# Altium PCB PCB1.PcbDoc (part 2 of 2)
Units mm, origin at the board's own origin, x right, y up, seen from the top; angles counter-clockwise.
Board outline 66.67 x 62.99 mm, 6 copper layers (Top Layer, Signal 1, Signal 2, GND, Power, Bottom Layer), stack 1.313 mm thick; 81 components, 107 nets, 466 pads, 129 vias.
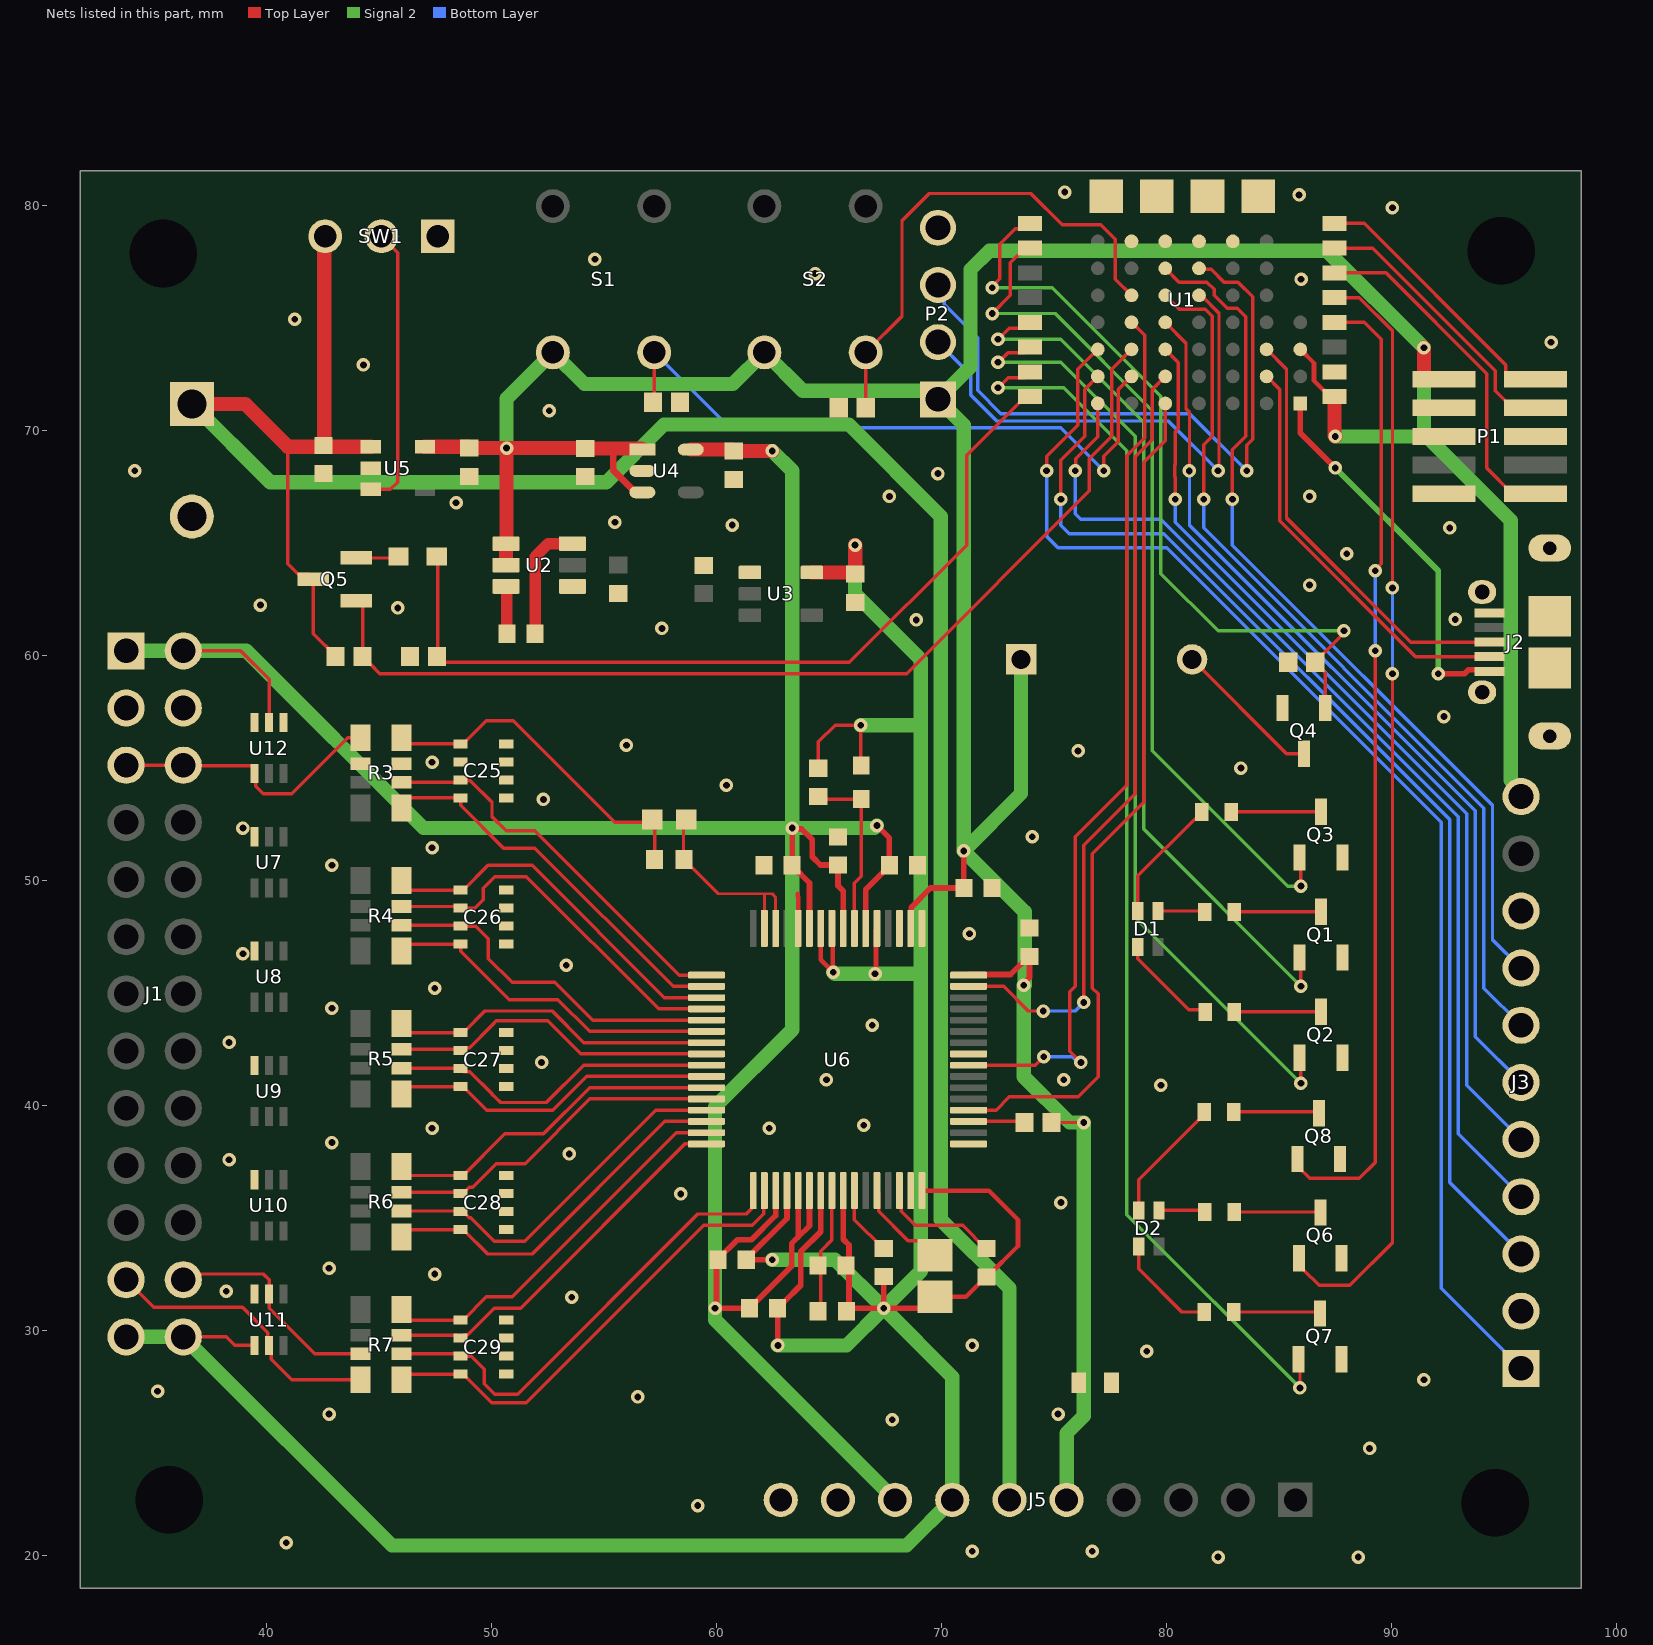
[diagram p4: the nets of this part, all layers, seen from the top]

## Via types
v1: diameter 0.6, hole 0.3, Top Layer to Bottom Layer, tented both sides, 129 vias

## Nets (pads, with @x,y where several pads share a name; then routed paths per layer and width w, separated by ;. In a path a pad name is that pad's centre, name@x,y a point inside that pad or via, vN(x,y) a via of type N, cw(c..) or ccw(c..) an arc to the next point about the centre after c; other vN are vias at no path point) (continued)
AFERST: U1.B6 U6.36 | length 37.7
  Top Layer w0.152: U6.36@71.213,39.791 72.43,39.791 73.025,40.386 76.073,40.386 76.962,41.275 76.962,44.958 76.708,45.212 76.708,51.181 78.994,53.467 78.994,68.58 79.949,69.535 U1.B6@79.949,71.191
AFESCK: U1.A3 U6.40 | length 40
  Top Layer w0.152: U6.40@71.213,41.791 74.174,41.791 74.547,42.164 v1(74.549,42.164) ; v1(76.2,41.91) 75.699,42.411 75.699,45.046 75.946,45.293 75.946,51.943 78.232,54.229 78.232,68.868 79.03,69.666 79.03,74.21 U1.A3@78.449,74.791
  Bottom Layer w0.152: v1(74.549,42.164) 75.825,42.164 76.079,41.91 v1(76.2,41.91)
AGND: C9.2 C10.2 C22.2 C23.2 C24.2 C25.1 C25.2 C25.3 C25.4 C25.6 C26.1 C26.2 C26.3 C26.4 C27.1 C27.2 C27.3 C27.4 C28.1 C28.2 C28.3 C28.4 C29.1 C29.2 C29.3 C29.4 J1.03 J1.04 J5.10 R3.2 R3.7 R20.2 U6.31 U6.33 U6.41 U6.49 U6.51 U6.60 U7.3 U8.3 U9.3 U10.3 U11.3 U12.1 U12.3 | length 1.5
  Top Layer w0.203: 63.627,49.403 63.627,49.276 63.638,49.265 U6.60@63.638,47.866
  other v1: 40.894,20.574 59.182,22.225 67.818,26.035 42.799,26.289 75.184,26.289 56.515,27.051 35.179,27.305 71.374,29.337 53.575,31.477 38.227,31.75 47.498,32.512 42.799,32.766 75.311,35.687 58.42,36.068 38.354,37.592 53.467,37.846 42.926,38.354 47.371,38.989 62.357,38.989 66.548,39.116 64.897,41.148 75.438,41.148 52.236,41.91 38.354,42.799 66.929,43.561 42.926,44.323 47.498,45.212 53.34,46.228 38.971,46.736 71.247,47.625 42.926,50.673 47.371,51.453 38.971,52.324 52.324,53.594 60.452,54.229 47.371,55.245 56.007,56.007
AVDD: C6.1 C11.1 C12.1 C22.1 C23.1 C24.1 J1.01 J1.02 J5.8 U4.5 U6.19 U6.21 U6.22 U6.54 U6.56 U6.59 U12.2 | length 130.9
  Top Layer w0.152: J1.02@36.322,60.198 38.862,60.198 40.132,58.928 U12.2@40.132,57.017 ; C23.1@63.373,50.646 C23.1@63.373,50.673 ; v1(63.373,52.324) v1@63.41,52.287 ; C24.1@67.691,50.646 C24.1@67.691,50.673
  Top Layer w0.254: U6.19@62.638,36.216 62.638,35.106 61.568,34.036 60.941,34.036 60.079,33.174 C11.1@60.079,33.147 60.012,33.08 60.012,31.052 v1(59.946,30.986) 61.474,30.986 C12.1@61.476,30.988 61.476,31.015 61.728,31.267 61.755,31.267 63.348,32.86 63.348,33.861 63.638,34.152 ; C23.1@63.373,50.646 64.138,49.881 U6.59@64.138,47.866 ; C23.1@63.373,50.673 v1(63.373,52.324) ; v1@63.41,52.287 63.791,52.287 64.262,51.816 64.262,51.054 64.635,50.681 C22.1@65.405,50.681 ; U6.21@63.638,36.216 63.638,34.152 ; U6.22@64.138,36.216 64.138,34.652 63.638,34.152 ; C22.1@65.405,50.546 65.405,49.763 65.638,49.53 U6.56@65.638,47.866 ; U6.54@66.638,47.866 66.638,49.593 C24.1@67.691,50.646 ; v1(67.137,52.434) 67.691,51.88 C24.1@67.691,50.673
  Top Layer w0.635: U4.5@58.868,69.141 60.713,69.141 60.774,69.08 v1(62.492,69.08)
  Signal 2 w0.635: J1.01@33.782,60.198 J1.02@36.322,60.198 39.116,60.198 46.99,52.324 v1(63.373,52.324) ; v1(62.492,69.08) 63.373,68.199 v1(63.373,52.324) ; v1(67.137,52.434) 67.027,52.324 v1(63.373,52.324) ; J5.8@67.945,22.479 59.946,30.478 59.946,39.941 63.373,43.368 v1(63.373,52.324)
AVSS: C4.1 C11.2 C12.2 C13.2 C14.2 C15.2 C16.2 C17.2 C19.2 C20.2 J1.25 J1.26 J5.7 U3.5 U6.20 U6.23 U6.25 U6.32 U6.53 U6.57 U6.58 U11.4 | length 156.5
  Top Layer w0.152: J1.26@36.322,29.718 38.227,29.718 38.602,29.343 U11.4@39.482,29.343 ; C15.2@64.535,54.983 64.535,56.153 65.278,56.896 v1(66.421,56.896) 66.421,55.133 C16.2@66.44,55.114 ; v1(67.056,45.847) v1@67.097,45.888 ; U6.53@67.097,47.825 U6.53@67.138,47.866
  Top Layer w0.203: U6.58@64.641,47.863 64.641,46.471 v1(65.197,45.914) ; U6.57@65.138,47.866 65.167,47.837 v1@65.167,46.003 ; v1@67.097,45.888 U6.53@67.097,47.825 ; U6.32@69.138,36.216 72.115,36.216 73.406,34.925 73.406,33.755 72.036,32.385 C14.2@72.009,32.385 71.982,32.385 71.093,31.496 C13.2@69.723,31.496
  Top Layer w0.254: v1(62.484,33.147) C11.2@61.333,33.147 61.333,33.174 63.138,34.979 U6.20@63.138,36.216 ; v1(62.738,29.337) 62.734,29.341 62.734,30.984 C12.2@62.73,30.988 62.73,31.015 62.982,31.267 63.009,31.267 63.754,32.012 63.754,33.506 64.638,34.39 U6.23@64.638,36.216 ; U6.25@65.638,36.216 65.638,34.057 65.897,33.798 C19.2@65.897,33.147 ; C19.2@65.77,32.893 65.897,32.766 65.897,30.988 v1(67.437,30.988) ; C17.2@67.437,32.393 v1(67.437,30.988) ; C13.2@69.723,31.496 69.215,30.988 v1(67.437,30.988)
  Top Layer w0.635: U3.5@64.248,63.68 C4.1@66.175,63.68 ; v1(66.167,64.897) 66.175,64.889 C4.1@66.175,63.68 ; C4.1@66.175,63.603 C4.1@66.175,63.68
  Signal 2 w0.635: J1.25@33.782,29.718 J1.26@36.322,29.718 45.593,20.447 68.453,20.447 J5.7@70.485,22.479 70.485,27.94 v1(67.437,30.988) ; v1(62.484,33.147) 65.278,33.147 v1(67.437,30.988) ; v1(62.738,29.337) 65.786,29.337 v1(67.437,30.988) ; v1(65.197,45.914) 65.264,45.847 v1(67.056,45.847) 68.961,45.847 69.088,45.72 ; v1(66.167,64.897) 66.167,62.738 69.088,59.817 69.088,56.896 ; v1(66.421,56.896) 69.088,56.896 ; v1(67.437,30.988) 69.088,32.639 69.088,45.72 ; 69.088,45.72 69.088,56.896
BATLVL: R14.1 R18.2 U1.8 | length 38.1
  Top Layer w0.152: R14.1@47.586,64.389 47.625,64.35 47.625,59.978 R18.2@47.591,59.944 47.845,59.69 65.913,59.69 71.12,64.897 71.12,68.884 73.727,71.491 U1.8@73.93,71.491
BATMEASEN: Q5.1 R11.2 U1.A4 | length 45.7
  Top Layer w0.152: Q5.1@44.003,62.423 44.065,62.423 44.289,62.199 44.289,59.918 44.616,59.591 44.642,59.591 45.051,59.182 68.455,59.182 76.576,67.303 76.576,68.736 77.563,69.723 77.563,72.705 U1.A4@78.449,73.591
BATT: C7.1 J4.1 J5.6 Q5.3 R11.1 SW1.3 U5.1 | length 110.9
  Top Layer w0.152: 40.968,69.268 40.968,64.061 41.432,63.597 41.879,63.597 Q5.3@42.103,63.373 42.103,60.954 43.087,59.97 R11.1@43.087,59.944
  Top Layer w0.635: J4.1@36.703,71.167 39.069,71.167 40.968,69.268 U5.1@44.655,69.268 ; C7.1@42.553,69.326 42.589,69.362 42.589,78.577 SW1.3@42.625,78.613
  Signal 2 w0.635: J4.1@36.703,71.167 40.179,67.691 55.118,67.691 57.678,70.251 65.893,70.251 69.977,66.167 69.977,34.925 73.025,31.877 J5.6@73.025,22.479
BIAS: J1.05 J1.06 R3.1 U12.4 | length 12.4
  Top Layer w0.152: J1.05@33.782,55.118 J1.06@36.322,55.118 36.347,55.093 39.38,55.093 39.482,54.991 U12.4@39.482,54.743 39.543,54.682 39.543,54.183 39.878,53.848 41.148,53.848 43.635,56.335 R3.1@44.196,56.335
BIASDRV: C18.2 C25.5 R2.2 R3.8 | length 15.2
  Top Layer w0.152: R3.8@46.025,56.337 46.298,56.064 C25.5@48.641,56.064 48.755,56.064 49.784,57.093 50.984,57.093 55.499,52.578 57.048,52.578 57.261,52.365 R2.2@57.261,50.927
BLUEN1: Q1.1 U1.5 | length 39
  Top Layer w0.152: v1(72.517,74.041) 73.013,74.537 73.676,74.537 U1.5@73.93,74.791 ; Q1.1@85.915,46.571 85.976,46.51 v1(85.976,45.301)
  Signal 2 w0.152: v1(72.517,74.041) 75.311,74.041 78.994,70.358 78.994,52.283 v1(85.976,45.301)
BLUEN2: Q6.1 U1.13 | length 49.3
  Top Layer w0.152: Q6.1@85.885,33.217 85.885,32.899 86.075,32.709 86.78,32.004 88.138,32.004 90.043,33.909 v1(90.043,59.182) ; U1.13@87.468,75.891 88.574,75.891 90.043,74.422 v1(90.043,62.992)
  Bottom Layer w0.152: v1(90.043,59.182) v1(90.043,62.992)
BUZZEN: Q4.1 R12.1 U1.1 | length 34.5
  Top Layer w0.152: v1(72.263,76.327) 72.263,76.395 72.603,76.735 72.603,78.269 73.286,78.952 73.691,78.952 U1.1@73.93,79.191 ; Q4.1@87.056,57.658 87.056,59.222 86.614,59.664 86.614,59.716 87.884,60.986 v1(87.884,61.087)
  Signal 2 w0.152: v1(72.263,76.327) 74.93,76.327 79.756,71.501 79.756,63.627 82.296,61.087 v1(87.884,61.087)
D_N: J2.2 U1.E5 | length 18.5
  Top Layer w0.152: U1.E5@84.449,72.391 85.03,71.81 85.03,65.973 91.067,59.936 J2.2@94.353,59.936
D_P: J2.3 U1.E4 | length 19.2
  Top Layer w0.152: U1.E4@84.449,73.591 85.335,72.705 85.335,66.099 90.848,60.586 J2.3@94.353,60.586
DATAEN: R13.1 S1.3 U1.A5 | length 29.1
  Top Layer w0.152: R13.1@57.184,71.247 57.241,71.304 S1.3@57.241,73.458 ; v1(77.216,68.199) 77.216,68.834 77.868,69.486 77.868,71.81 U1.A5@78.449,72.391
  Bottom Layer w0.152: S1.3@57.241,73.458 60.595,70.104 75.311,70.104 v1(77.216,68.199)
DC: J3.3 U1.Z5 | length 50.6
  Top Layer w0.152: v1(75.311,66.929) 75.311,68.666 76.368,69.723 76.368,71.81 U1.Z5@76.949,72.391
  Bottom Layer w0.152: v1(75.311,66.929) 75.311,65.786 75.692,65.405 79.883,65.405 92.583,52.705 92.583,36.576 J3.3@95.758,33.401
DRDY: U1.B5 U6.47 | length 35
  Top Layer w0.152: U6.47@71.213,45.291 72.774,45.291 73.869,44.196 v1(74.531,44.196) ; v1(76.329,44.577) 76.327,44.579 76.327,51.562 78.613,53.848 78.613,68.818 79.368,69.573 79.368,71.81 U1.B5@79.949,72.391
  Bottom Layer w0.152: v1(74.531,44.196) 75.946,44.196 76.327,44.577 v1(76.329,44.577)
DVDD: C5.1 C8.1 C9.1 C10.1 J3.11 J5.5 LS1.1 P1.1 P2.1 R1.1 S1.1 S2.1 U1.9 U1.F4 U2.4 U2.5 U4.1 U4.3 U5.5 U6.48 U6.50 | length 176.3
  Top Layer w0.127: C8.1@48.969,69.268 C8.1@49.03,69.207 ; U4.1@56.668,69.191 U4.1@56.718,69.141
  Top Layer w0.152: R1.1@74.896,39.243 v1(76.327,39.243)
  Top Layer w0.203: U1.F4@85.949,73.591 86.555,72.985 86.555,72.201 87.265,71.491 U1.9@87.468,71.491
  Top Layer w0.254: U6.50@68.638,47.866 68.661,47.889 68.661,48.797 69.521,49.657 C9.1@71.001,49.657 70.997,49.661 70.997,51.304 v1(70.993,51.308) ; U6.48@71.213,45.791 71.236,45.814 73.076,45.814 73.887,46.625 C10.1@73.914,46.625 73.914,45.687 73.66,45.433 v1(73.66,45.339)
  Top Layer w0.305: 55.423,69.191 55.423,68.223 56.405,67.241 U4.3@56.718,67.241
  Top Layer w0.635: U5.5@47.055,69.268 C8.1@48.969,69.268 ; C8.1@49.03,69.207 v1(50.681,69.207) ; U2.5@50.66,64.008 U2.4@50.66,64.958 50.674,64.958 50.681,64.965 v1(50.681,69.207) ; U4.1@56.668,69.191 55.423,69.191 C5.1@54.178,69.191 54.162,69.207 v1(50.681,69.207) ; R1.1@74.803,39.37 74.896,39.277 R1.1@74.896,39.243 ; U1.9@87.468,71.491 87.468,69.758 v1(87.503,69.723) ; v1(91.442,73.662) 91.442,72.316 91.495,72.263 P1.1@92.326,72.263
  Signal 2 w0.635: v1(50.681,69.207) 50.681,71.398 S1.1@52.741,73.458 54.143,72.056 60.737,72.056 S2.1@62.139,73.458 63.842,71.755 69.469,71.755 P2.1@69.85,71.374 ; LS1.1@73.543,59.817 73.543,53.858 v1(70.993,51.308) ; v1(73.66,45.339) 73.66,41.275 75.692,39.243 v1(76.327,39.243) 76.327,26.2 75.565,25.438 J5.5@75.565,22.479 ; v1@73.7,45.339 73.7,48.601 v1(70.993,51.308) ; v1(87.503,69.723) 91.318,69.723 91.442,69.848 ; J3.11@95.758,53.721 95.758,53.996 95.301,54.453 95.301,65.989 91.442,69.848 ; P2.1@69.85,71.374 70.993,70.231 v1(70.993,51.308) ; P2.1@69.85,71.374 71.298,72.822 71.298,77.14 72.136,77.978 87.127,77.978 v1(91.442,73.662) 91.442,69.848
GND: C1.2 C3.2 C4.2 C5.2 C6.2 C7.2 C8.2 J2.5 J2.6 J2.7 J2.8 J2.9 J2.10 J2.11 J3.9 J4.2 J5.9 P1.3 P1.5 P1.9 P2.4 Q1.2 Q2.2 Q3.2 Q4.2 Q6.2 Q7.2 Q8.2 R12.2 R13.2 R18.1 R19.2 R20.1 SW1.1 U1.10 U1.A0 U1.B0 U1.C0 U1.D0 U1.H0 U1.H1 U1.H2 U1.H3 U2.1 U3.1 U4.2 U5.2
  other v1: 82.296,19.939 88.519,19.939 71.374,20.193 76.708,20.193 89.027,24.765 91.44,27.813 79.121,29.083 79.756,40.894 74.041,51.943 83.312,54.991 76.073,55.753 92.329,57.277 57.585,61.193 68.888,61.574 92.837,61.595 45.847,62.103 39.751,62.23 86.36,63.119 88.011,64.516 92.583,65.659 60.706,65.786 55.499,65.913 48.441,66.781 67.691,67.056 86.36,67.056 69.85,68.072 34.163,68.199 52.578,70.866 44.323,72.898 97.088,73.908 41.275,74.93 85.979,76.708 64.389,76.962 54.61,77.597 90.043,79.883 85.895,80.455 75.481,80.582
GRNEN1: Q3.1 U1.2 | length 38.1
  Top Layer w0.152: v1(72.263,75.184) 73.07,75.991 73.07,77.308 73.07,77.434 73.727,78.091 U1.2@73.93,78.091 ; Q3.1@85.915,51.016 85.976,50.955 v1(85.976,49.746)
  Signal 2 w0.152: v1(72.263,75.184) 75.057,75.184 79.375,70.866 79.375,55.763 85.392,49.746 v1(85.976,49.746)
GRNEN2: Q8.1 U1.12 | length 43.4
  Top Layer w0.152: Q8.1@85.819,37.617 85.819,37.3 86.362,36.757 88.573,36.757 89.281,37.465 v1(89.281,60.198) ; U1.12@87.468,74.791 88.785,74.791 89.535,74.041 89.535,64.067 89.281,63.813 v1(89.281,63.754)
  Bottom Layer w0.152: v1(89.281,60.198) v1(89.281,63.754)
IN1N: C29.5 R7.8 U6.15 | length 17.2
  Top Layer w0.152: R7.8@46.025,30.937 46.025,30.848 46.406,30.467 C29.5@48.641,30.467 48.755,30.467 49.784,31.496 50.927,31.496 58.222,38.791 U6.15@59.563,38.791
IN1P: C29.6 R7.7 U6.16 | length 17.2
  Top Layer w0.152: R7.7@46.025,29.79 48.518,29.79 C29.6@48.641,29.667 48.781,29.807 48.95,29.807 50.131,30.988 51.308,30.988 58.611,38.291 U6.16@59.563,38.291
IN2N: C28.7 R6.6 U6.13 | length 16.5
  Top Layer w0.152: R6.6@46.025,35.31 48.618,35.31 C28.7@48.641,35.287 48.755,35.287 49.035,35.008 49.09,35.008 50.131,33.966 51.492,33.966 57.317,39.791 U6.13@59.563,39.791
IN2P: C28.8 R6.5 U6.14 | length 16.6
  Top Layer w0.152: R6.5@46.025,34.163 46.349,34.487 C28.8@48.641,34.487 48.755,34.487 49.841,33.401 51.816,33.401 57.706,39.291 U6.14@59.563,39.291
IN3N: C28.5 R6.8 U6.11 | length 15.3
  Top Layer w0.152: R6.8@46.025,37.287 46.025,37.268 46.406,36.887 C28.5@48.641,36.887 48.755,36.887 50.603,38.735 52.324,38.735 54.38,40.791 U6.11@59.563,40.791
IN3P: C28.6 R6.7 U6.12 | length 15.3
  Top Layer w0.152: R6.7@46.025,36.14 48.588,36.14 C28.6@48.641,36.087 48.755,36.087 49.035,36.366 49.183,36.366 50.224,37.408 51.505,37.408 54.388,40.291 U6.12@59.563,40.291
IN4N: C27.7 R5.6 U6.9 | length 14.9
  Top Layer w0.152: R5.6@46.036,41.649 R5.6@46.025,41.66 48.618,41.66 48.629,41.649 C27.7@48.641,41.637 48.773,41.505 49.046,41.505 50.038,40.513 50.038,40.502 50.224,40.316 50.235,40.316 50.419,40.132 52.451,40.132 54.11,41.791 U6.9@59.563,41.791
IN4P: C27.8 R5.5 U6.10 | length 14.7
  Top Layer w0.152: R5.5@46.025,40.513 46.349,40.837 48.755,40.837 49.803,39.789 52.743,39.789 54.245,41.291 U6.10@59.563,41.291
IN5N: C27.5 R5.8 U6.7 | length 14.7
  Top Layer w0.152: R5.8@46.025,43.637 46.025,43.618 46.406,43.237 48.755,43.237 49.714,44.196 52.705,44.196 54.11,42.791 U6.7@59.563,42.791
IN5P: C27.6 R5.7 U6.8 | length 14.8
  Top Layer w0.152: R5.7@46.051,42.463 R5.7@46.025,42.49 48.588,42.49 C27.6@48.641,42.437 48.773,42.569 49.046,42.569 50.038,43.561 50.038,43.572 50.224,43.758 52.508,43.758 53.975,42.291 U6.8@59.563,42.291
IN6N: C26.7 R4.6 U6.5 | length 15.8
  Top Layer w0.152: R4.6@46.025,48.01 48.599,48.01 C26.7@48.641,47.968 49.314,47.968 49.867,47.415 49.867,46.526 50.927,45.466 52.832,45.466 54.507,43.791 U6.5@59.563,43.791
IN6P: C26.8 R4.5 U6.6 | length 15.4
  Top Layer w0.152: R4.5@46.025,46.863 46.33,47.168 C26.8@48.641,47.168 48.655,47.154 48.655,46.849 50.8,44.704 52.959,44.704 54.372,43.291 U6.6@59.563,43.291
IN7N: C26.5 R4.8 U6.3 | length 16.6
  Top Layer w0.152: R4.8@46.025,49.987 46.025,49.949 46.406,49.568 C26.5@48.641,49.568 48.755,49.568 49.86,50.673 51.816,50.673 57.698,44.791 U6.3@59.563,44.791
IN7P: C26.6 R4.7 U6.4 | length 16.9
  Top Layer w0.152: R4.7@46.025,48.84 48.569,48.84 C26.6@48.641,48.768 49.276,48.768 49.657,49.149 49.657,49.657 50.165,50.165 51.562,50.165 57.436,44.291 U6.4@59.563,44.291
IN8N: C25.7 R3.6 U6.1 | length 17.5
  Top Layer w0.152: R3.6@46.025,54.36 48.537,54.36 C25.7@48.641,54.464 48.675,54.43 49.075,54.43 50.038,53.467 50.038,52.832 50.673,52.197 51.943,52.197 58.349,45.791 U6.1@59.563,45.791
IN8P: C25.8 R3.5 U6.2 | length 17.4
  Top Layer w0.152: R3.5@46.025,53.213 46.025,53.283 46.406,53.664 C25.8@48.641,53.664 48.641,53.34 50.546,51.435 51.943,51.435 58.087,45.291 U6.2@59.563,45.291
INSRB1: C29.7 R7.6 U6.17 | length 20.9
  Top Layer w0.152: R7.6@46.025,28.96 48.548,28.96 C29.7@48.641,28.867 49.111,28.867 49.702,28.276 49.702,27.641 50.165,27.178 51.181,27.178 59.182,35.179 61.341,35.179 61.564,35.402 61.564,36.142 U6.17@61.638,36.216
INSRB2: C29.8 R7.5 U6.18 | length 21.2
  Top Layer w0.152: R7.5@46.025,27.813 46.279,28.067 C29.8@48.641,28.067 48.755,28.067 50.025,26.797 51.562,26.797 59.436,34.671 61.595,34.671 62.105,35.181 62.105,36.183 U6.18@62.138,36.216
LCDCS: J3.5 U1.B4 | length 41.8
  Top Layer w0.152: U1.B4@79.949,73.591 80.53,73.01 80.53,70.078 80.391,69.939 80.391,68.462 80.378,68.449 80.378,67.927 80.391,67.915 v1(80.391,66.929)
  Bottom Layer w0.152: v1(80.391,66.929) 80.391,65.913 93.345,52.959 93.345,40.894 J3.5@95.758,38.481
LCDMISO: J3.7 U1.B2 | length 40
  Top Layer w0.152: U1.B2@79.949,75.991 80.568,75.372 81.727,75.372 82.03,75.069 82.03,69.723 81.661,69.354 v1(81.661,66.929)
  Bottom Layer w0.152: v1(81.661,66.929) 81.661,65.659 94.107,53.213 94.107,45.212 J3.7@95.758,43.561
LCDMOSI: J3.6 U1.B3 | length 40.3
  Top Layer w0.152: U1.B3@79.949,74.791 80.868,73.872 80.868,70.95 81.026,70.792 81.026,68.206 v1(81.009,68.188)
  Bottom Layer w0.152: v1(81.009,68.188) 81.026,68.171 81.026,65.786 93.726,53.086 93.726,43.053 J3.6@95.758,41.021
LCDRST: J3.4 U1.Z6 | length 46
  Top Layer w0.152: v1(75.946,68.199) 75.967,68.22 75.967,68.728 76.949,69.71 U1.Z6@76.949,71.191
  Bottom Layer w0.152: v1(75.946,68.199) 75.946,66.294 76.2,66.04 79.756,66.04 92.964,52.832 92.964,38.735 J3.4@95.758,35.941
LCDSCK: J3.8 U1.B1 | length 39.1
  Top Layer w0.152: U1.B1@79.949,77.191 80.559,76.581 81.788,76.581 82.115,76.254 82.115,76 82.705,75.41 83.152,75.41 83.53,75.032 83.53,69.723 82.931,69.124 v1(82.931,66.929)
  Bottom Layer w0.152: v1(82.931,66.929) 82.931,64.897 94.488,53.34 94.488,47.371 J3.8@95.758,46.101
LIT: J3.1 U1.Z4 | length 57.8
  Top Layer w0.152: v1(74.676,68.199) 74.676,68.834 76.063,70.221 76.063,72.705 U1.Z4@76.949,73.591
  Bottom Layer w0.152: 74.676,67.86 74.676,65.278 75.184,64.77 80.01,64.77 92.202,52.578 92.202,31.877 J3.1@95.758,28.321 ; v1(74.676,68.199) 74.681,68.194 74.681,67.86
NetC2_1: C2.1 U2.6 | length 2.2
  Top Layer w0.127: C2.1@50.66,60.997 C2.1@50.697,60.96
  Top Layer w0.254: U2.6@50.66,63.058 U2.6@50.697,63.021
  Top Layer w0.508: C2.1@50.697,60.96 U2.6@50.697,63.021
NetC2_2: C2.2 U2.3 | length 5.3
  Top Layer w0.508: C2.2@51.951,60.96 51.951,64.381 52.528,64.958 U2.3@53.61,64.958
NetC13_1: C13.1 U6.28 | length 4.3
  Top Layer w0.152: U6.28@67.138,36.216 67.212,36.142 67.212,35.306 68.519,33.999 69.072,33.999 C13.1@69.723,33.348
NetC14_1: C14.1 U6.30 | length 5.4
  Top Layer w0.152: U6.30@68.138,36.216 68.212,36.142 68.212,35.306 68.846,34.671 70.95,34.671 71.982,33.639 C14.1@72.009,33.639
NetC15_1: C15.1 C16.1 U6.55 | length 7.8
  Top Layer w0.152: C15.1@64.535,53.729 64.662,53.602 C16.1@66.44,53.602 ; U6.55@66.138,47.866 66.138,49.882 66.44,50.184 C16.1@66.44,53.602 ; C16.1@66.44,53.614 C16.1@66.44,53.602
NetC17_1: C17.1 U6.26 | length 3.1
  Top Layer w0.152: U6.26@66.138,36.216 66.138,34.919 67.41,33.647 C17.1@67.437,33.647
NetC18_1: C18.1 R2.1 U6.62 U6.63 | length 9.4
  Top Layer w0.127: C18.1@58.547,52.578 58.547,50.943 R2.1@58.563,50.927 58.563,50.874 58.878,50.559 58.93,50.559 60.087,49.403 62.103,49.403 ; U6.63@62.138,47.866 62.138,49.368 62.103,49.403 ; U6.62@62.638,47.866 62.638,49.249 62.484,49.403 62.103,49.403
NetC19_1: C19.1 C20.1 U6.24 | length 5.2
  Top Layer w0.152: C19.1@64.516,32.893 64.643,32.766 C20.1@64.643,30.988 ; C19.1@64.643,33.147 64.643,33.528 65.138,34.023 U6.24@65.138,36.216
NetD1_1: D1.1 R8.2 | length 5.6
  Top Layer w0.152: D1.1@78.729,48.641 78.729,50.2 81.253,52.724 81.353,52.724 81.577,52.948 R8.2@81.577,53.048
NetD1_2: D1.2 R9.2 | length 2.1
  Top Layer w0.152: D1.2@79.629,48.641 81.666,48.641 R9.2@81.704,48.603
NetD1_4: D1.4 R10.2 | length 4.5
  Top Layer w0.152: D1.4@78.729,47.041 78.729,46.513 80.984,44.258 81.619,44.258 R10.2@81.719,44.158
NetD2_1: D2.1 R15.2 | length 5.6
  Top Layer w0.152: D2.1@78.772,35.344 78.772,36.696 81.689,39.613 R15.2@81.689,39.713
NetD2_2: D2.2 R16.2 | length 2.1
  Top Layer w0.152: D2.2@79.672,35.344 81.628,35.344 R16.2@81.704,35.268
NetD2_4: D2.4 R17.2 | length 4.7
  Top Layer w0.152: D2.4@78.772,33.744 78.772,32.739 80.688,30.823 R17.2@81.689,30.823
NetLS1_2: LS1.2 Q4.3 | length 6.9
  Top Layer w0.152: LS1.2@81.143,59.817 85.334,55.626 Q4.3@86.106,55.626 Q4.3@85.979,55.753
NetQ1_3: Q1.3 R9.1 | length 3.9
  Top Layer w0.152: R9.1@83.004,48.603 Q1.3@86.865,48.603
NetQ2_3: Q2.3 R10.1 | length 3.8
  Top Layer w0.152: R10.1@83.019,44.158 Q2.3@86.865,44.158
NetQ3_3: Q3.3 R8.1 | length 4
  Top Layer w0.152: R8.1@82.877,53.048 Q3.3@86.865,53.048
NetQ5_2: Q5.2 R14.2 | length 1.9
  Top Layer w0.152: Q5.2@44.003,64.323 45.82,64.323 R14.2@45.886,64.389
NetQ6_3: Q6.3 R16.1 | length 3.8
  Top Layer w0.152: R16.1@83.004,35.268 86.816,35.268 Q6.3@86.835,35.249
NetQ7_3: Q7.3 R17.1 | length 3.9
  Top Layer w0.152: R17.1@82.989,30.823 86.759,30.823 Q7.3@86.822,30.759
NetQ8_3: Q8.3 R15.1 | length 3.8
  Top Layer w0.152: R15.1@82.989,39.713 86.705,39.713 Q8.3@86.769,39.649
NetR1_2: R1.2 U6.35 | length 2.2
  Top Layer w0.152: U6.35@71.213,39.291 73.392,39.291 R1.2@73.44,39.243
NRST: P1.10 U1.14 | length 15.4
  Top Layer w0.152: U1.14@87.468,76.991 88.992,76.991 89.754,76.991 94.234,72.511 94.234,68.32 95.371,67.183 P1.10@96.396,67.183
PWREN: SW1.2 U5.3 | length 12.7
  Top Layer w0.152: U5.3@44.577,67.29 U5.3@44.655,67.368 45.524,67.368 45.847,67.691 45.847,77.891 SW1.2@45.125,78.613
REDEN1: Q2.1 U1.6 | length 42.1
  Top Layer w0.152: v1(72.517,73.025) 72.548,73.025 72.96,73.437 73.676,73.437 U1.6@73.93,73.691 ; Q2.1@85.915,42.126 85.976,42.065 v1(85.976,40.983)
  Signal 2 w0.152: v1(72.517,73.025) 75.311,73.025 78.613,69.723 78.613,48.346 v1(85.976,40.983)
REDEN2: Q7.1 U1.7 | length 54.7
  Top Layer w0.152: v1(72.517,71.882) 72.972,72.337 73.676,72.337 U1.7@73.93,72.591 ; Q7.1@85.872,28.727 85.933,28.666 v1(85.933,27.45)
  Signal 2 w0.152: v1(72.517,71.882) 75.438,71.882 78.232,69.088 78.232,35.151 v1(85.933,27.45)
SDCS: J3.2
SRB1: J1.24 R7.3 U11.2 | length 10.2
  Top Layer w0.152: J1.24@36.322,32.258 36.576,32.512 39.878,32.512 40.132,32.258 U11.2@40.132,31.617 40.132,30.988 42.16,28.96 R7.3@44.196,28.96
SRB2: J1.23 R7.4 U11.5 | length 12.9
  Top Layer w0.152: J1.23@33.782,32.258 35.013,31.027 38.95,31.027 40.072,29.905 40.072,29.403 40.234,29.242 40.234,28.727 41.148,27.813 R7.4@44.196,27.813
SWDCLK: P1.4 U1.15 | length 12.4
  Top Layer w0.152: U1.15@87.468,78.091 89.168,78.091 94.615,72.644 94.615,71.749 95.371,70.993 P1.4@96.396,70.993
SWDIO: P1.2 U1.16 | length 12
  Top Layer w0.152: U1.16@87.468,79.191 88.784,79.191 95.077,72.898 95.077,72.557 95.371,72.263 P1.2@96.396,72.263
SWO: P1.6
TESTEN: R19.1 S2.3 U1.A2 | length 22.6
  Top Layer w0.152: R19.1@66.641,70.993 66.639,70.995 S2.3@66.639,73.458 68.251,75.07 68.251,79.3 69.469,80.518 73.975,80.518 75.372,79.121 77.089,79.121 77.725,78.485 77.725,76.715 U1.A2@78.449,75.991
UARTRX: P2.3 U1.C1 | length 29.6
  Top Layer w0.152: U1.C1@81.449,77.191 81.485,77.155 81.982,77.155 82.557,76.581 83.181,76.581 83.835,75.927 83.835,69.597 83.566,69.328 v1(83.566,68.199)
  Bottom Layer w0.152: P2.3@69.85,76.454 70.127,76.177 70.127,75.597 71.615,74.109 71.615,71.768 72.644,70.739 81.026,70.739 v1(83.566,68.199)
UARTTX: P2.2 U1.C2 | length 23.6
  Top Layer w0.152: U1.C2@81.362,75.991 U1.C2@81.449,75.991 81.539,75.991 82.335,75.195 82.335,68.238 v1(82.296,68.199)
  Bottom Layer w0.152: P2.2@69.85,73.914 71.31,72.454 71.31,71.565 72.466,70.409 80.086,70.409 v1(82.296,68.199)
VBUS: J2.1 U1.F6 | length 16.9
  Top Layer w0.254: U1.F6@85.949,71.191 85.949,69.88 v1(87.503,68.326) ; v1@92.141,59.248 v1(92.075,59.182) 93.245,59.182 93.422,59.359 J2.1@94.28,59.359
  Signal 2 w0.254: v1(87.503,68.326) 92.075,63.754 v1(92.075,59.182)
pads on no net: D1.3 D2.3 J2.4 J3.10 P1.7 P1.8 S1.2 S1.4 S2.2 S2.4 U1.3 U1.4 U1.A1 U1.C3 U1.C4 U1.C5 U1.C6 U1.D1 U1.D2 U1.D3 U1.D4 U1.D5 U1.D6 U1.E0 U1.E1 U1.E2 U1.E3 U1.F3 U1.F5 U3.4 U4.4 U5.4 U6.27 U6.29 U6.37 U6.38 U6.42 U6.44 U6.45 U6.46 U6.52 U6.61 U6.64 U7.1 U7.6 U8.6 U9.6 U10.6 U11.6 U12.5 U12.6

## Polygon pours and split planes (outlines as drawn)
GND on Top Layer "GND_L01_P003" (solid, remove dead copper, pour order 3): 31.75,61.468 37.467,61.468 40.642,58.293 65.659,58.293 76.697,47.255 76.697,23.876 64.026,23.876 64.026,18.542 98.425,18.542 98.425,81.534 31.75,81.534
AGND on Top Layer "AGND_L01_P001" (solid, remove dead copper, pour order 1): 76.697,23.876 64.026,23.876 64.026,18.542 31.75,18.542 31.75,61.468 37.467,61.468 40.642,58.293 65.659,58.293 76.697,47.255 76.697,28.194
GND on Signal 2 "GND_L03_P010" (solid, remove dead copper, pour order 10): 31.75,61.468 37.467,61.468 40.642,58.293 65.659,58.293 76.697,47.255 76.697,23.876 64.026,23.876 64.026,18.542 98.425,18.542 98.425,81.534 31.75,81.534
AGND on Signal 2 "AGND_L03_P005" (solid, remove dead copper, pour order 5): 64.026,18.542 64.026,23.876 76.697,23.876 76.697,28.194 76.697,34.29 76.697,47.255 65.659,58.293 40.642,58.293 37.467,61.468 31.75,61.468 31.75,18.542
GND on Signal 1 "GND_L02_P004" (solid, remove dead copper, pour order 4): 31.75,61.468 37.467,61.468 40.642,58.293 65.659,58.293 76.697,47.255 76.697,23.876 64.026,23.876 64.026,18.542 98.425,18.542 98.425,81.534 31.75,81.534
AGND on Signal 1 "AGND_L02_P002" (solid, remove dead copper, pour order 2): 64.026,18.542 64.026,23.876 76.697,23.876 76.697,28.194 76.697,34.29 76.697,47.255 65.659,58.293 40.642,58.293 37.467,61.468 31.75,61.468 31.75,18.542
GND on Bottom Layer "GND_L06_P012" (solid, remove dead copper, pour order 12): 31.75,61.468 37.467,61.468 40.642,58.293 65.659,58.293 76.697,47.255 76.697,23.876 64.026,23.876 64.026,18.542 98.425,18.542 98.425,81.534 31.75,81.534
AGND on Bottom Layer "AGND_L06_P009" (solid, remove dead copper, pour order 9): 64.026,18.542 64.026,23.876 76.697,23.876 76.697,28.194 76.697,34.29 76.697,47.255 65.659,58.293 40.642,58.293 37.467,61.468 31.75,61.468 31.75,18.542

## Keep-outs
Keep-Out Layer:
  circle w0.254: c35.433,77.851 r3
  circle w0.254: c94.869,77.978 r3
  circle w0.254: c94.615,22.352 r3
  circle w0.254: c35.687,22.479 r3

## Silkscreen, mask and mechanical layers (free items; w line width, h text height)
Top Overlay:
  text "Base Board V1" at 41.656,20.32 h1.52
Bottom Overlay:
  lines w0.254: 39.37,75.057 39.37,74.168 51.181,74.168 51.181,75.057 ; 41.974,28.702 42.862,28.702 ; 42.037,61.722 42.926,61.722 42.926,28.702 ; 60.96,28.067 60.96,29.21 87.63,29.21 87.63,28.067 ; 74.549,70.104 75.438,70.104 75.438,80.391 74.549,80.391 ; 89.662,26.67 88.773,26.67 88.773,55.372 89.662,55.372
  text "GND" at 74.444,78.472 h1.02
  text "UART" at 77.064,76.683 h1.02 r90
  text "RX" at 73.508,75.971 h1.02
  text "TEST BTTN" at 67.25,75.565 h1.02
  text "DATA BTTN" at 57.852,75.438 h1.02
  text "ON" at 43.409,74.828 h1.02
  text "OFF" at 48.743,74.701 h1.02
  text "TX" at 73.381,73.431 h1.02
  text "PWR SWITCH" at 49.886,72.415 h1.02
  text "JLINK" at 94.717,71.984 h1.02 r90
  text "VCC" at 74.444,70.979 h1.02
  text "+" at 34.773,70.722 h1.02
  text "BATTERY" at 40.107,68.224 h1.02
  text "-" at 34.646,65.431 h1.02
  text "MICRO USB" at 97.917,63.144 h1.02 r90
  text "VDD" at 42.012,59.715 h1.02
  text "AGND" at 42.012,57.175 h1.02
  text "BIAS" at 42.012,54.635 h1.02
  text "DVDD" at 93.574,53.365 h1.02
  text "CH8" at 42.012,52.095 h1.02
  text "EEG CONNECTOR" at 44.806,51.156 h1.02 r90
  text "CH7" at 42.012,49.555 h1.02
  text "GND" at 93.574,48.158 h1.02
  text "LCD CONNECTOR" at 87.986,47.346 h1.02 r90
  text "CH6" at 42.012,47.015 h1.02
  text "SCK" at 93.574,45.745 h1.02
  text "CH5" at 42.012,44.475 h1.02
  text "MISO" at 93.447,43.078 h1.02
  text "CH4" at 42.012,41.935 h1.02
  text "MOSI" at 93.621,40.626 h1.02
  text "CH3" at 42.012,39.395 h1.02
  text "CS" at 93.574,38.125 h1.02
  text "CH" at 42.012,36.855 h1.02
  text "RT" at 93.447,35.585 h1.02
  text "CH1" at 42.012,34.315 h1.02
  text "DC" at 93.447,32.918 h1.02
  text "SRB" at 42.012,31.775 h1.02
  text "CUSTOM AFE CONNECTOR" at 84.176,29.997 h1.02
  text "AVSS" at 42.012,29.235 h1.02
  text "3V3" at 76.074,28.464 h1.02 r90
  text "AGND" at 63.348,28.423 h1.02 r90
  text "GND" at 65.888,28.423 h1.02 r90
  text "2V5" at 68.428,28.423 h1.02 r90
  text "-2V5" at 70.968,28.423 h1.02 r90
  text "BAT" at 73.508,28.423 h1.02 r90
  text "MOSI" at 78.588,28.423 h1.02 r90
  text "MSO" at 81.128,28.423 h1.02 r90
  text "SCK" at 83.668,28.423 h1.02 r90
  text "CS" at 86.208,28.423 h1.02 r90
  text "LIT" at 93.32,27.711 h1.02
  text "+" at 36.805,26.907 h1.02
  text "-" at 34.138,26.823 h1.02
Board:
  the board outline again, w0.5

## Text inside footprints (layer, text, board x,y; h text height)
J2: Mechanical 1 "PCB EDGE" at 98.028,66.286 h1 r90
R3: Top 3D Body "*" at 44.272,55.334 h1.27
R4: Top 3D Body "*" at 44.272,48.984 h1.27
R5: Top 3D Body "*" at 44.272,42.634 h1.27
R6: Top 3D Body "*" at 44.272,36.284 h1.27
R7: Top 3D Body "*" at 44.272,29.934 h1.27